# Altium PCB Voltage-Regulator-Crcuit1.PcbDoc
Units mil, origin at the board's own origin, x right, y up, seen from the top; angles counter-clockwise.
Board outline 2300 x 1275 mil, 2 copper layers (Top Layer, Bottom Layer); 9 components, 7 nets, 26 pads, 0 vias.
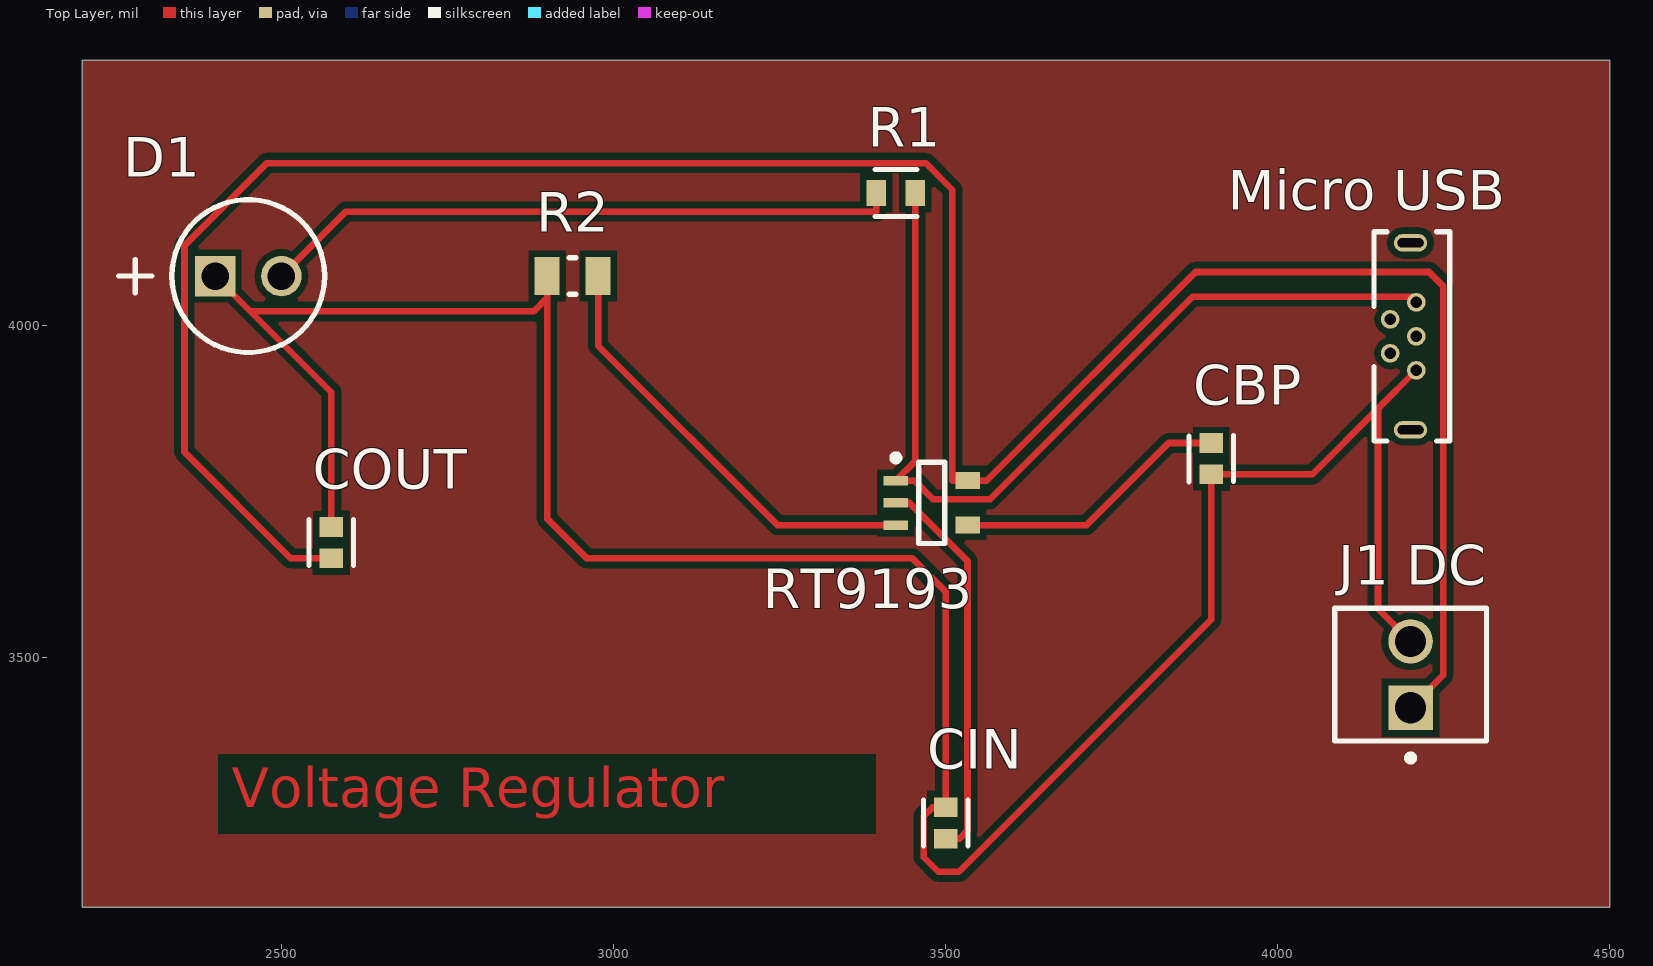
[diagram p0: Top Layer view]
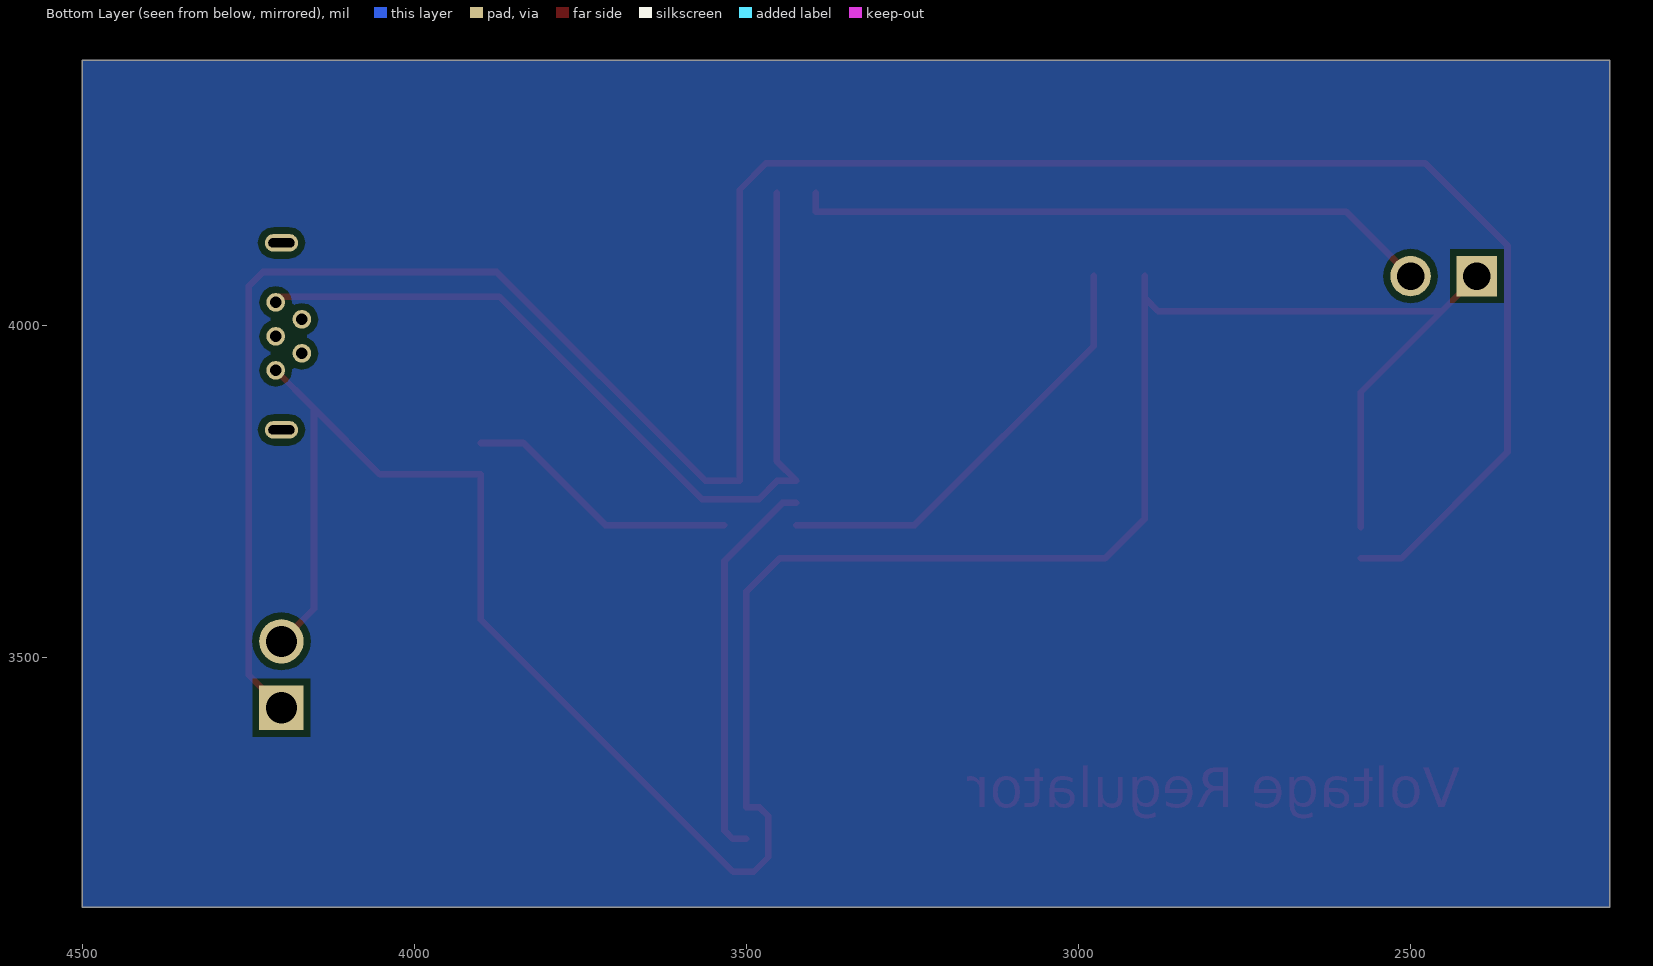
[diagram p1: Bottom Layer view, seen from below]
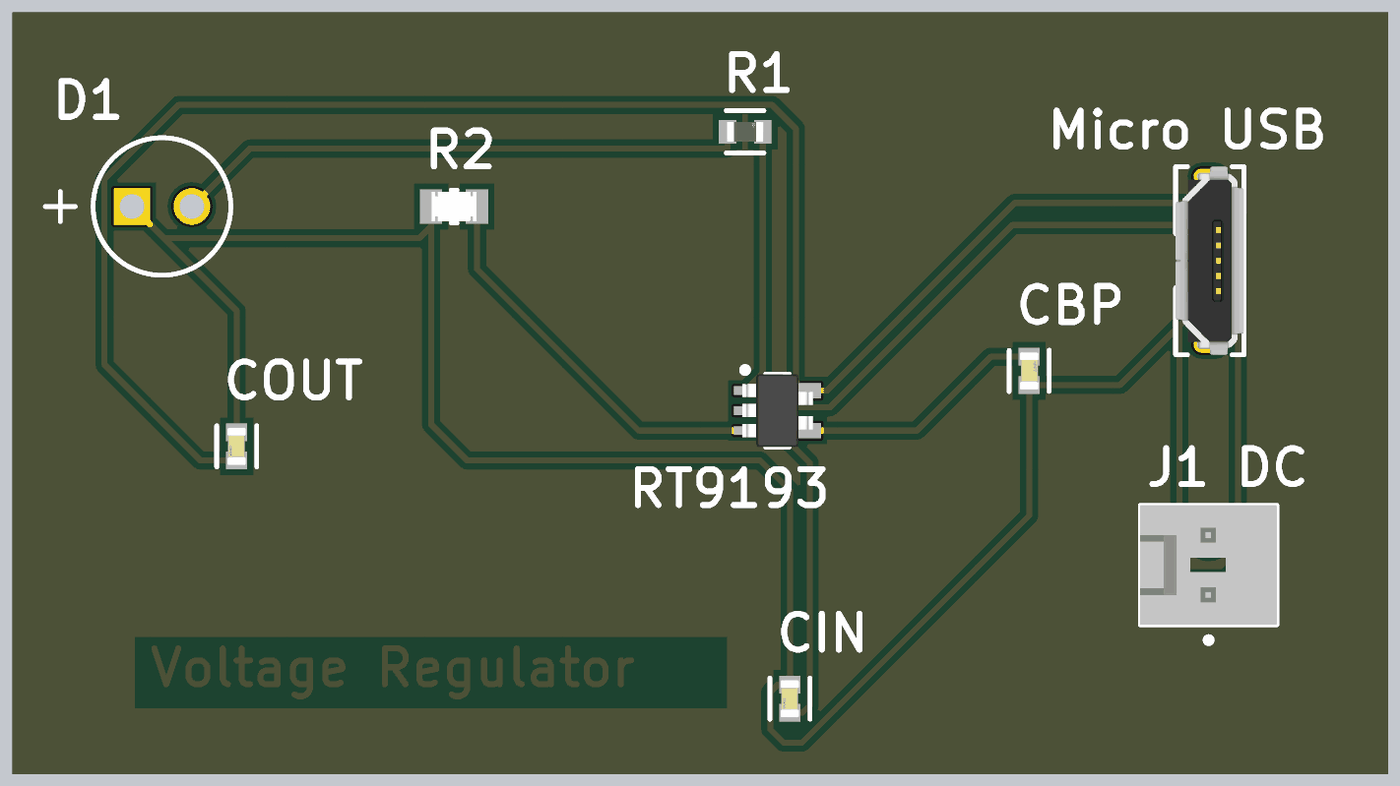
[diagram p2: 3D render of the assembled board from above, using the file's embedded part models]

## Layer stack, top to bottom
Top Solder: solder mask 0.4, Solder Resist, Dk 3.5
Top Layer: signal copper 1.4
Dielectric 1: dielectric 12.6, FR-4, Dk 4.8
Bottom Layer: signal copper 1.4
Bottom Solder: solder mask 0.4, Solder Resist, Dk 3.5

## Board outline
2200,3125 4500,3125 4500,4400 2200,4400

## Design rules (kind name [scope] priority, off if disabled: settings)
Clearance [All] p1: gap=10 ignorepadtopadclearanceinfootprint=FALSE except(0: Arc-Hole Track-Hole SMDPad-Hole THPad-Hole Via-Hole Fill-Hole Poly-Hole Region-Hole Text-Hole)
PolygonConnect [All] p1: connectstyle=Relief reliefconductorwidth=10 reliefentries=4 polygonreliefangle="90 Angle" airgapwidth=10
RoutingVias [All] p1: holewidth=28 width=50 viastyle="Through Hole" minholewidth=28 minwidth=50 maxholewidth=28 maxwidth=50
SolderMaskExpansion [All] p1: expansion=4
Width [All] p1: maxlimit=10 minlimit=10 preferedwidth=10
30 further rules are at their usual default settings.

## Components (designator, comment, footprint, x,y, rotation, side; value= is the part's Value field where it differs from the comment)
CBP "22nF" FP-C0603C-CF-MFG 3900,3800 r270 top value="0.10 µF"
CIN "1μF/X7R" FP-C0603C-CF-MFG 3500,3251.38 r90 top value="0.10 µF"
COUT "1μF/X7R" FP-C0603C-CF-MFG 2575,3673.62 r90 top value="0.10 µF"
D1 "LED" AVAG-HLMP-3301-2 2400,4075 r0 top
"J1 DC" "3.3V OUT" MOLX-22-27-2021_V 4200,3475 r90 top
"Micro USB" "5V IN" 614105150721 4200,3984.24 r270 top
R1 "220Ω" FP-CRCW0603-e3-MFG 3425,4200 r0 top
R2 "100KΩ" FP-CRCW0805-e3-MFG 2938.39,4075 r0 top
RT9193 "SOT-23-5" SOT85P279X130-5N 3344.13,3638.46 r0 top

## Footprints (in the part's own frame and the unit in brackets; to place one, negate y for a bottom-side part, rotate by r counter-clockwise, add the part's x,y. Pads: shape width x height; smd on the part's side, far side on the other; paste and mask are expansions set on the pad)
614105150721 [mm] "Micro USB 2.0 Type B Vertical 5 Contacts"
  round 0.711 hole 0.44: 1(-1.3,0.22) 2(-0.65,-0.78) 3(0,0.22) 4(0.65,-0.78) 5(1.3,0.22)
  oval 0.672x1.271 hole 0.35 slot 1 at 90 deg: Shell(-3.575,0) Shell(3.575,0)
  silkscreen extent -4,-1.4 4,1.5, body extent -4,-1.4 4,1.5, height 5.64
AVAG-HLMP-3301-2 [mm] "THD, 2-Leads, Body Dia 5.85mm"
  rect 1.55x1.55 hole 1.05: 1(0,0)
  round 1.55 hole 1.05: 2(2.54,0)
  silkscreen extent -3.68,-2.92 4.19,2.92
FP-C0603C-CF-MFG [mm]
  rect 0.75x0.9 smd paste+0 mask+0: 1(-0.6,0) 2(0.6,0)
  silkscreen extent -0.87,-0.85 0.88,0.85, body extent -1.2,-0.6 1.2,0.6, height 0.25
FP-CRCW0603-e3-MFG [mm]
  rect 0.75x1 smd paste+0 mask+0: 1(-0.75,0) 2(0.75,0)
  silkscreen extent -0.8,-0.9 0.8,0.9, body extent -1.22,-0.6 1.22,0.6, height 0.25
FP-CRCW0805-e3-MFG [mm]
  rect 0.95x1.45 smd paste+0 mask+0: 1(-0.975,0) 2(0.975,0)
  silkscreen extent -0.13,-0.7 0.13,0.7, body extent -1.55,-0.82 1.55,0.82, height 0.25
MOLX-22-27-2021_V [mm] "Header, 2-Leads, Body 5.8x5.08mm"
  rect 1.7x1.7 hole 1.19: 1(-1.27,0)
  round 1.7 hole 1.19: 2(1.27,0)
  silkscreen extent -3.31,-2.9 2.54,2.9, body extent -2.54,-2.9 2.54,2.9, height 11.72
SOT85P279X130-5N [mm] "SOT23, 5-Leads, Body 2.90x2.79mm, Pitch 0.85mm, IPC Medium Density"
  rect 0.95x0.371 smd: 1(2.054,3.263) 2(2.054,2.413) 3(2.054,1.563)
  rect 0.95x0.65 smd: 4(4.804,1.563) 5(4.804,3.263)
  silkscreen extent 1.93,0.86 3.93,4.26, body extent 1.93,0.86 4.93,3.96, height 1.3

## Part data
CBP CIN COUT: library part CMP-2006-03061-2, "CAP CER 0.1UF 50V X7R 0603", Capacitance="0.10 µF", Manufacturer=KEMET, Manufacturer Part Number=C0603C104K5RACTU, Package=C0603C-CF, Temperature="-55°C to +125°C", Temperature Characteristic=X7R, Temperature Coefficient=30ppm/°C, Temperature Range High=+125°C, Temperature Range Low=-55°C, Tolerance=0.1, Voltage Rating="50 V", Automotive=Yes, Automotive Grade="Grade 1", Category=Cap, ComponentLink2Description=Datasheet, ComponentLink2URL=https://api.kemet.com/component-edge/download/datasheet/C0603C100J5GACAUTO.pdf, Device Class L1="Passive Components", Device Class L2=Capacitors, Device Class L3="Ceramic Capacitors", Digikey Description="CAP CER 0.1UF 50V X7R 0603", Height=0.87mm, Lead Free=Yes, Material=Ceramic, Octopart=https://octopart.com/c0603c104k5ractu-kemet-139244, RoHS=TRUE
D1: library part CMP-2000-06411-1, "T-1 3/4 (5 mm) Diffused LED Lamp, 1.9 V, -40 to 100 degC, 2-Pin THD, RoHS, Bulk", Emitting Color=Red, Forward Current=25mA, Forward Voltage=2.4V, Manufacturer=Avago, Operating Temperature Classification=Industrial, Operating Temp Range=-40Cto100C, Package Description="2-Pin Through Hole LED, Dia 5.85 mm", Package Reference=HLMP-3301, Package Type=T-13/4, Power Dissipation=85W, Reverse Voltage=5V, Test Current (It)=10mA, Chip Material=GaP, Datasheet URL=http://www.avagotech.com/docs/AV02-1558EN, Datasheet Version=03/2015, DELETED=Compliant, Dominant Wave Length=626nm, High Brightness=No, Lens Dimensions=5.08x5.08x8.3mm, Lens Type=ColoredDiffused, Luminous Intensity=5.4mcd, Lum Intensity=5.4mcd, Main Category=StandardLED, Manufacturer URL=http://www.avagotech.com/, Mounting=ThroughHole, Mounting Technology=ThroughHole, Number of  Elements=1, Packaging=TapeandReel, Peak Wavelength=635nm, Pin Count=2, Product Depth (mm)=6.1mm, Product Height (mm)=9.19mm, Product Length (mm)=6.1mm, Rad Hardened=No, Shape Type=Circular, Type=Uni-Color, Viewing Angle=60deg
"J1 DC": library part CMP-2000-05537-1, "Male Header, Pitch 2.54 mm, 1 x 2 Position, Height 11.7 mm, Tail Length 3.56 mm, 0 to 75 degC, RoHS, Bulk", Current - Max=4A, Manufacturer=Molex, Operating temperature=0°Cto+75°C, Package Description="2-Leads Header, Body 5.08 x 5.8 mm, Pitch 2.54 mm", Package Reference=22-27-2021, Package Version="Rev. BC, 02/2012", PartNumber=0022272021, Voltage - Max=250V, Contact material=Tinplatedbrass, Current rating=4A, Datasheet URL=http://www.molex.com/pdm_docs/sd/022272021_sd.pdf, Datasheet Version="Rev. F, 06/2009", Housing material=Nylon(UL94V-0), Manufacturer URL=http://www.molex.com/, Mounting Technology=ThroughHole, No. of Positions=2, No. of Rows=1, Orientation=Vertical, Pitch=2.54mm, Voltage Rating=250V
"Micro USB": library part CMP-1502-03250-1, "Micro USB 2.0 Type B Receptacle WR-COM, Vertical, THT", Contact Resistance=30mOhm, Manufacturer="Wurth Elektronik", Operating temperature=-40to85degC, Package Reference=614105150721, Rated Current=1.8A, Working Voltage=30VAC, Connector Type=MicroUSB2.0TypeB, Datasheet URL=https://katalog.we-online.de/em/datasheet/614105150721.pdf, Gender=Receptacle, Manufacturer URL=http://www.we-online.de, Mounting Technology=THT, Orientation=Vertical, Packaging=TapeandReel, Part Number=614105150721, Publisher=WurthElektronik
R1: library part CMP-2000-03085-2, "RES Thick Film, 220O, 1%, 0.1W, 100ppm/°C, 0603", Case/Package=0603, Case Code (Metric)=1608, Max Operating Temperature=155°C, Max Power Dissipation=100mW, Min Operating Temperature=-55°C, Package Quantity=10, Resistance=220R, Temperature Coefficient=100ppm/°C, Tolerance=1%, Voltage Rating=75V, Case Code (Imperial)=0603, Composition="Thick Film", Contact Plating=Tin, Depth=0.85mm, Features="Automotive AEC-Q200", Height=0.45mm, Lead Free="Lead Free", Length=1.55mm, Military Standard=Not, Number of Terminations=2, Packaging="Tape and Reel", Power Rating=100mW, Radiation Hardening=No, Termination=SMD/SMT, Voltage Rating (DC)=75V, Weight=7.1E-05oz, Width=0.033inch
R2: library part CMP-2001-04899-2, "RES Thick Film, 100kO, 1%, 0.125W, 100ppm/°C, 0805", Case/Package=0805, Case Code (Metric)=2012, Max Operating Temperature=155°C, Min Operating Temperature=-55°C, Package Quantity=5000, Power Rating=125mW, Resistance=100kR, Temperature Coefficient=100ppm/°C, Tolerance=1%, Voltage Rating=150V, Case Code (Imperial)=0805, Composition="Thick Film", Contact Plating=Tin, Depth=1.25mm, Height=0.45mm, Lead Free="Lead Free", Length=2mm, Military Standard=Not, Mount="Surface Mount", Number of Pins=2, Packaging="Tape and Reel", Radiation Hardening=No, Termination=SMD/SMT, Voltage Rating (DC)=150V, Weight=0.000194oz, Width=1.25mm
RT9193: library part Component_1

## Nets (pads, with @x,y where several pads share a name; then routed paths per layer and width w, separated by ;. In a path a pad name is that pad's centre, name@x,y a point inside that pad or via, vN(x,y) a via of type N, cw(c..) or ccw(c..) an arc to the next point about the centre after c; other vN are vias at no path point)
GND: "J1 DC.2" "Micro USB.5" CBP.2 CIN.2 COUT.2 D1.1 R2.1 | length 3903.6
  Top Layer w10: D1.1 2453,4022 ; COUT.2 2575,3900 2453,4022 ; R2.1 2900,4042 ; 4200,3525 4151,3574 4151,3875.41 ; 4208.66,3933.07 4151,3875.41 ; 2453,4022 2880,4022 2900,4042 ; 2900,4042 2900,3710 2960,3650 3450,3650 3500,3600 CIN.2 3480,3275 3467,3262 3467,3200 3489,3178 3520,3178 3900,3558 CBP.2 4051.97,3776.38 4151,3875.41
NetCBP_1: CBP.1 RT9193.4 | length 417.9
  Top Layer w10: RT9193.4 3712,3700 3835.62,3823.62 CBP.1
NetCIN_1: CIN.1 RT9193.2 | length 588.3
  Top Layer w10: RT9193.2 3445.54,3733.46 3533,3646 3533,3240 3520.76,3227.76 CIN.1
NetCOUT_1: "J1 DC.1" COUT.1 RT9193.5 | length 3793.4
  Top Layer w10: COUT.1 2514,3650 2354,3810 2354,4121 2478,4245 3470,4245 3510,4205 3510,3766.93 RT9193.5 3561.93,3766.93 3876,4081 4228,4081 4249,4060 4249,3474 4200,3425
NetD1_2: D1.2 R1.1 | length 963.7
  Top Layer w10: D1.2 2597,4172 3395.47,4172 R1.1
"NetMicro USB_1": "Micro USB.1" R1.2 RT9193.1 | length 1375.4
  Top Layer w10: R1.2 3454.53,3796.46 RT9193.1 3453.07,3766.93 3481,3739 3567,3739 3872,4044 4203,4044 4203,4035.43 4208.66,4035.43
NetR2_2: R2.2 RT9193.3 | length 665.1
  Top Layer w10: R2.2 2976.77,3970 3246.77,3700 RT9193.3
pads on no net: "Micro USB.2" "Micro USB.3" "Micro USB.4" "Micro USB.Shell"

## Polygon pours and split planes (outlines as drawn)
no net on Mechanical 1 (solid): 1800,0
no net on Bottom Layer (solid, pour order 4): 2200,4400 4500,4400 4500,3125 2200,3125
no net on Bottom Layer (solid, pour order 0): 2750,4650
no net on Top Layer (solid, pour order 6): 2200,4400 4500,4400 4500,3125 2200,3125

## Other copper
Top Layer:
  text "Voltage Regulator" at 2425,3275 h60

## Silkscreen, mask and mechanical layers (free items; w line width, h text height)
Mechanical 1:
  lines w10: 2200,3125 2200,4400 2225,4400 4500,4400 4500,3750 4500,3125 2425,3125 2200,3125